# Altium PCB PCB1.PcbDoc
Units mil, origin at the board's own origin, x right, y up, seen from the top; angles counter-clockwise.
Board outline 1795 x 740 mil, 2 copper layers (Top Layer, Bottom Layer); 9 components, 8 nets, 26 pads, 0 vias.
Unrouted connection lines stored in the file: 6.
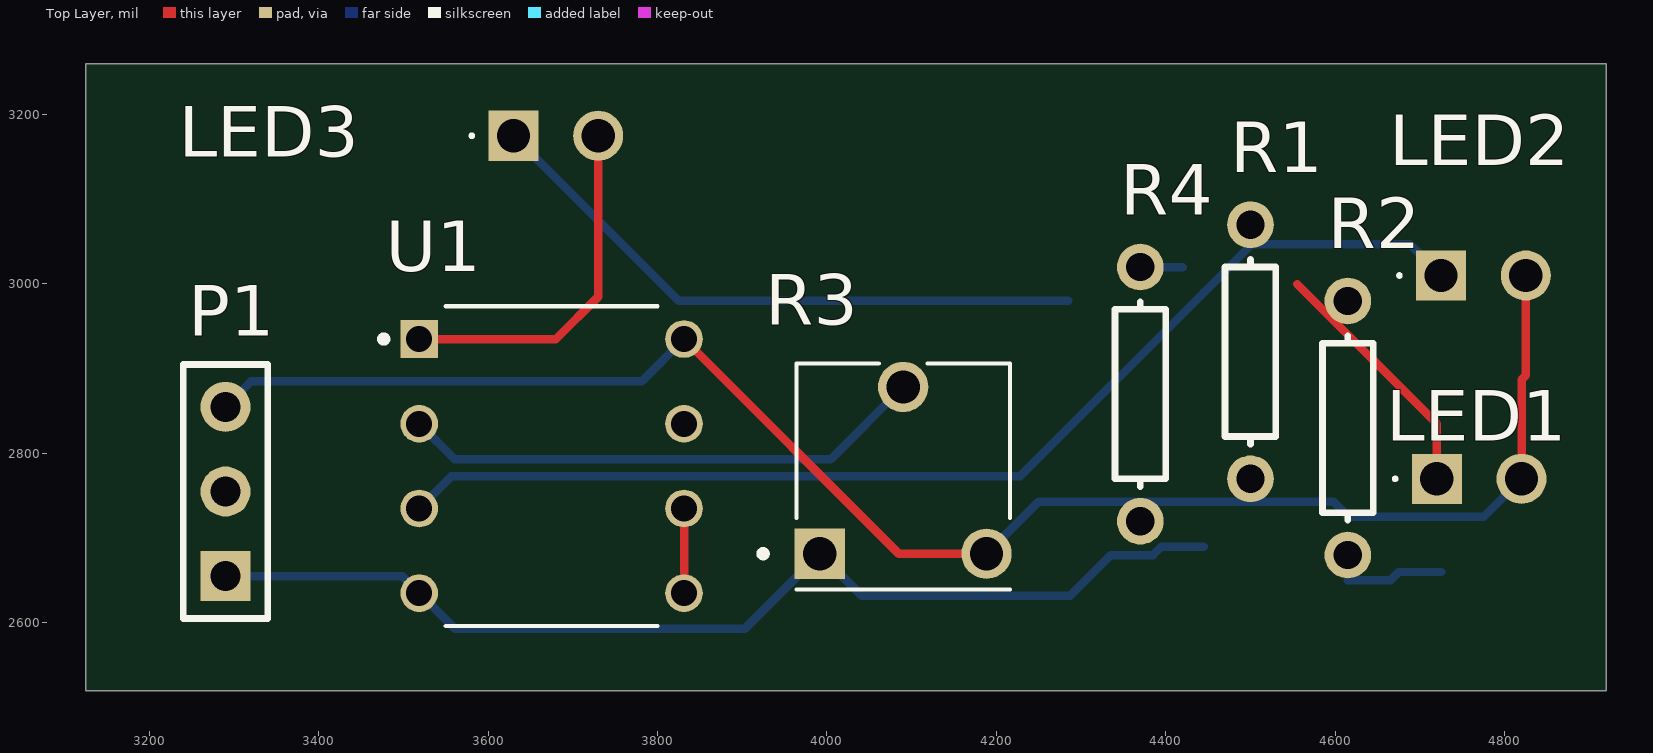
[diagram p0: Top Layer view]
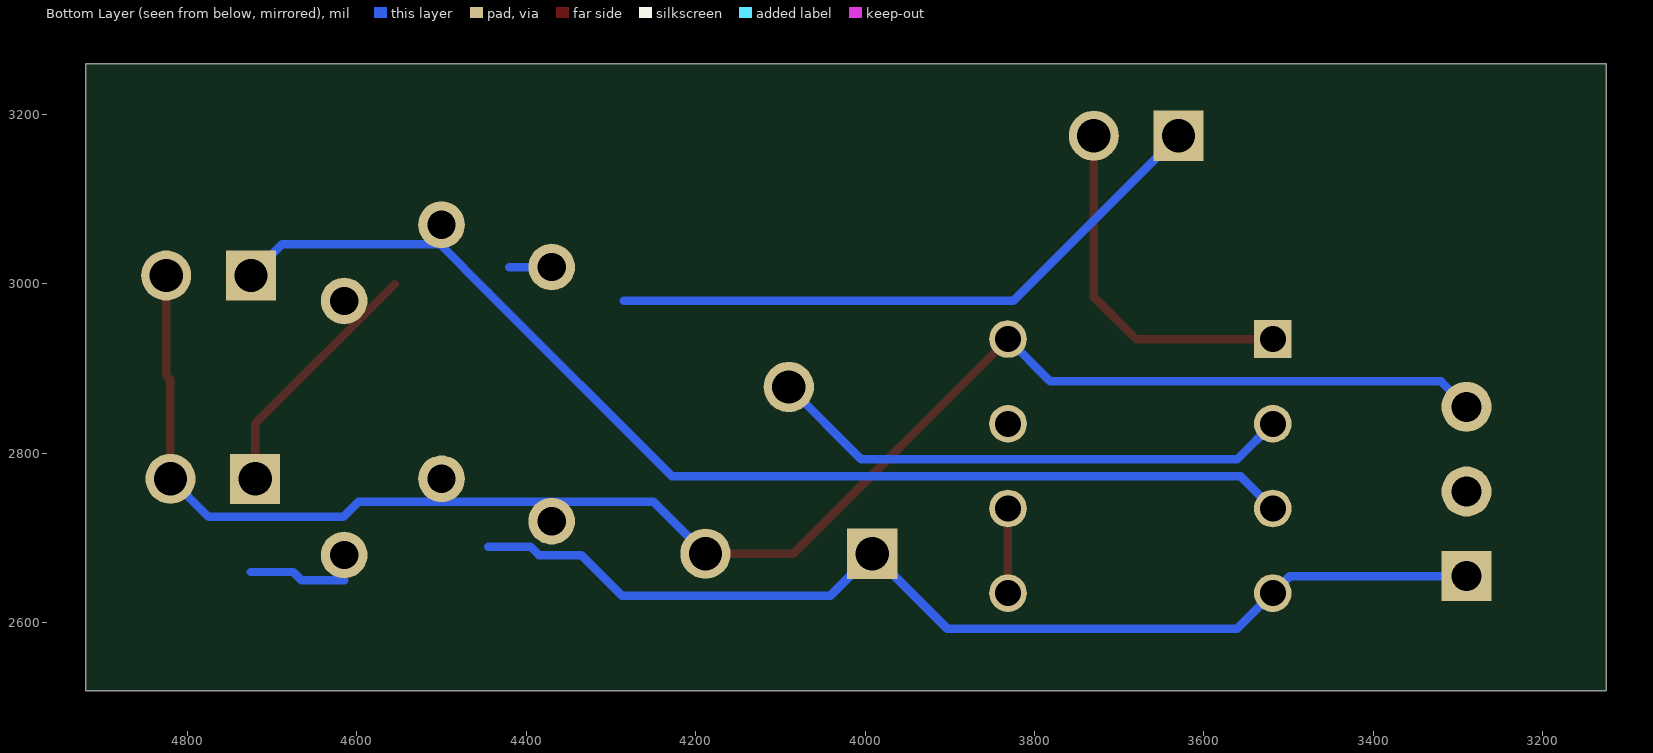
[diagram p1: Bottom Layer view, seen from below]

## Layer stack, top to bottom
Top Solder: solder mask 0.4, Solder Resist, Dk 3.5
Top Layer: signal copper 1.4
Dielectric 1: dielectric 12.6, FR-4, Dk 4.8
Bottom Layer: signal copper 1.4
Bottom Solder: solder mask 0.4, Solder Resist, Dk 3.5

## Board outline
3125,2520 4920,2520 4920,3260 3125,3260

## Design rules (kind name [scope] priority, off if disabled: settings)
Clearance [All] p1: gap=10 ignorepadtopadclearanceinfootprint=FALSE except(0: Arc-Hole Track-Hole SMDPad-Hole THPad-Hole Via-Hole Fill-Hole Poly-Hole Region-Hole Text-Hole)
PolygonConnect [All] p1: connectstyle=Relief reliefconductorwidth=10 reliefentries=4 polygonreliefangle="90 Angle" airgapwidth=10
RoutingVias [All] p1: holewidth=28 width=50 viastyle="Through Hole" minholewidth=28 minwidth=50 maxholewidth=28 maxwidth=50
SolderMaskExpansion [All] p1: expansion=4 istentingtop=FALSE
Width [All] p1: maxlimit=10 minlimit=10 preferedwidth=10
30 further rules are at their usual default settings.

## Components (designator, comment, footprint, x,y, rotation, side; value= is the part's Value field where it differs from the comment)
LED1 "15400385A3590" 15400385A3590 4720,2770 r0 top
LED2 "15400385A3590" 15400385A3590 4725,3010 r0 top
LED3 "15400385A3590" 15400385A3590 3630,3175 r0 top
P1 "Header 3" HDR1X3 3290,2655 r90 top
R1 "Res1" AXIAL-0.3 4500,2920 r90 top value=1K
R2 "Res1" AXIAL-0.3 4615,2830 r90 top value=1K
R3 "EVN-D8AA03B14" TRIM_EVN-D8AA03B14 4090,2780 r0 top
R4 "Res1" AXIAL-0.3 4370,2870 r90 top value=1K
U1 "LM358APE4" DIP794W45P254L959H508Q8 3675,2785 r0 top

## Footprints (in the part's own frame and the unit in brackets; to place one, negate y for a bottom-side part, rotate by r counter-clockwise, add the part's x,y. Pads: shape width x height; smd on the part's side, far side on the other; paste and mask are expansions set on the pad)
15400385A3590 [mm]
  rect 1.5x1.5 hole 1: 1(0,0)
  round 1.5 hole 1: 2(2.54,0)
  silkscreen extent -1.3,-0.05 -1.2,0.05, body extent -0.4,-1.45 2.94,1.45, height 11
AXIAL-0.3 [mm] "Axial Device, Thru-Hole; 2 Leads; 0.3 in Pin Spacing"
  round 1.4 hole 0.85: 1(-3.81,0) 2(3.81,0)
  silkscreen extent -2.77,-0.76 2.77,0.76
DIP794W45P254L959H508Q8 [mm]
  rect 1.13x1.13 hole 0.78: 1(-3.97,3.81)
  round 1.13 hole 0.78: 2(-3.97,1.27) 3(-3.97,-1.27) 4(-3.97,-3.81) 5(3.97,-3.81) 6(3.97,-1.27) 7(3.97,1.27) 8(3.97,3.81)
  silkscreen extent -5.13,-4.8 3.17,4.8, body extent -3.94,-4.79 3.94,4.79, height 5.08
HDR1X3 [mm] "Connector; Header; 3 Position"
  rect 1.5x1.5 hole 0.9: 1(0,0)
  round 1.5 hole 0.9: 2(2.54,0) 3(5.08,0)
  silkscreen extent -1.27,-1.27 6.35,1.27
TRIM_EVN-D8AA03B14 [mm]
  rect 1.508x1.508 / inner round 1.508 / far side rect 1.508x1.508 hole 1: 1(-2.5,-2.5)
  round 1.508 hole 1: 2(0,2.5) 3(2.5,-2.5)
  silkscreen extent -4.3,-3.57 3.2,3.2

## Part data
LED1 LED2 LED3: "LED", Manufacturer_Name="Wurth Elektronik", Mouser Part Number=710-15400385A3590, Datasheet Link=https://www.we-online.com/katalog/datasheet/15400385A3590.pdf, Height=10.9mm, Manufacturer_Part_Number=15400385A3590, Mouser Price/Stock=https://www.mouser.co.uk/ProductDetail/Wurth-Elektronik/15400385A3590?qs=5aG0NVq1C4yszs1ddn0oOg%3D%3D
P1: "Header, 3-Pin", LatestRevisionDate=17-Jul-2002, LatestRevisionNote="Re-released for DXP Platform.", Publisher="Altium Limited"
R1 R2 R4: "Resistor", LatestRevisionDate=17-Jul-2002, LatestRevisionNote="Re-released for DXP Platform.", PackageDescription="Axial Device, Thru-Hole; 2 Leads; 0.3 in Pin Spacing", PackageReference=AXIAL-0.3, Published=8-Jun-2000, Publisher="Altium Limited"
R3: "10 kOhms 0.1W, 1/10W PC Pins Through Hole Trimmer Potentiometer Carbon 1.0 Turn Top Adjustment", Package="PQFP-44 Panasonic", Availability="In Stock", Check_prices=https://www.snapeda.com/parts/EVN-D8AA03B14/Panasonic+Electronic+Components/view-part/?ref=eda, MF="Panasonic Electronic", MP=EVN-D8AA03B14, Price=None, Purchase-URL=https://pricing.snapeda.com/search/part/EVN-D8AA03B14/?ref=eda, SnapEDA_Link=https://www.snapeda.com/parts/EVN-D8AA03B14/Panasonic+Electronic+Components/view-part/?ref=snap
U1: "Dual, 30-V, 700-kHz operational amplifier", Package="PDIP-8 Texas", Availability="In Stock", Check_prices=https://www.snapeda.com/parts/LM358APE4/Texas+Instruments/view-part/?ref=eda, MF="Texas Instruments", MP=LM358APE4, Price=None, Purchase-URL=https://pricing.snapeda.com/search/part/LM358APE4/?ref=eda, SnapEDA_Link=https://www.snapeda.com/parts/LM358APE4/Texas+Instruments/view-part/?ref=snap

## Nets (pads, with @x,y where several pads share a name; then routed paths per layer and width w, separated by ;. In a path a pad name is that pad's centre, name@x,y a point inside that pad or via, vN(x,y) a via of type N, cw(c..) or ccw(c..) an arc to the next point about the centre after c; other vN are vias at no path point)
+5: LED1.2 LED2.2 P1.3 R3.3 U1.8 | length 1961.7
  Top Layer w10: U1.8 4084.73,2681.57 R3.3 ; LED1.2 4820,2887 4825,2892 LED2.2
  Bottom Layer w10: P1.3 3320,2885 3781.3,2885 U1.8 ; R3.3 4249.85,2743 4598,2743 4616,2725 4775,2725 LED1.2
GND: P1.1 R1.1 R2.1 R3.1 R4.1 U1.4 | length 1376.1
  Bottom Layer w10: P1.1 3498.7,2655 U1.4 3560.7,2593 3903,2593 R3.1 4041.15,2632 4287,2632 4335,2680 4385,2680 4395,2690 4445,2690 ; 4615,2650 4665,2650 4675,2660 4725,2660
NetLED1_1: LED1.1 R1.2 | length 298.3
  Top Layer w10: 4555,3000 4720,2835 LED1.1
NetLED2_1: LED2.1 R2.2 U1.3 | length 1350.9
  Bottom Layer w10: U1.3 3556.7,2773 4228,2773 4445,2990 4502,3047 4688,3047 LED2.1
NetLED3_1: LED3.1 R4.2 | length 785.8
  Bottom Layer w10: LED3.1 3825,2980 4285,2980 ; R4.2 4420,3020
NetR3_2: R3.2 U1.2 | length 624.1
  Bottom Layer w10: U1.2 3560.7,2793 4004.57,2793 R3.2
NetU1_5: U1.5 U1.6 | length 100
  Top Layer w10: U1.5 U1.6
Out: LED3.2 U1.1 | length 422
  Top Layer w10: U1.1 3680,2935 3730,2985 LED3.2
pads on no net: P1.2 U1.7